# EAGLE board potentiometer in circuit (EAGLE 7.6.0)

Size 56.82 x 53.33 mm. Coordinates in mm from the lower left corner, seen from the top.
Outline: 0,0 56.82,0 56.82,53.33 0,53.33 0,0
Copper layers (1*16): Top 0.035mm / dielectric 1.5mm / Bottom 0.035mm
Design rules "default": minimum track width 10mil, minimum drill 24mil, track to track 8mil, track to pad 8mil, pad to pad 8mil, via to via 8mil, smd to smd 8mil, copper to edge 40mil, drill to drill 8mil, minimum pad ring 10mil, minimum via ring 8mil, stop-mask expansion 4mil, vias tented up to drill 0mil, thermal gap 10mil

## Footprints (pad centres in the part's own frame; a part is rotated, then mirrored left to right if it is on the bottom)
DC-POWER = drill 0.889 pad 2.54 octagon: + 0,2.54; - 0,-2.54
LED5MM = drill 0.813 octagon: A -1.27,0; K 1.27,0
0207/10 = drill 0.813 octagon: 1 -5.08,0; 2 5.08,0
B25V = drill 0.813 long: A 2.54,0.635; E -2.54,0.635; S 0,0.635

## Placement (x,y rotation side)
BAT1  [DC-POWER]  5,10.08 0 top
D1  [LED5MM]  5,35.48 0 top
Meter1  [DC-POWER]  5,60.88 0 top  (outside the outline)
R1  1k‎Ω  [0207/10]  5,48.18 0 top
Rpot1  500k‎Ω  [B25V]  5,22.78 0 top

## Library data of the parts
BAT1 D1 Meter1 R1 Rpot1 = AUTODESK_CIRCUITS_BREADBOARD

## Nets
N$1: Meter1.+ R1.1 Rpot1.S
N$2: BAT1.- D1.K Meter1.- Rpot1.E
N$3: D1.A R1.2
N$4: BAT1.+ Rpot1.A

## Tracks (layer width: path | path; a pad name or v marks a point on that pad's centre or on a via)
N$1  (2 unrouted)
N$2  (3 unrouted)
N$3  (1 unrouted)
N$4  (1 unrouted)